# Allegro board SG2002_QFN88_38_2L_20230323_V13.brd
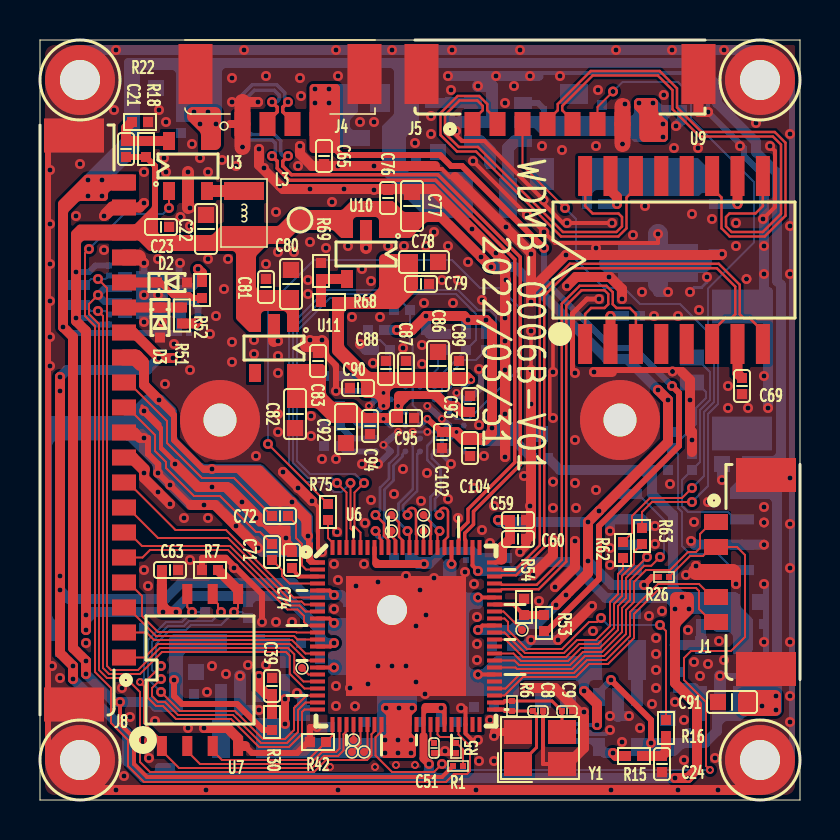
[diagram p0: board, top side]
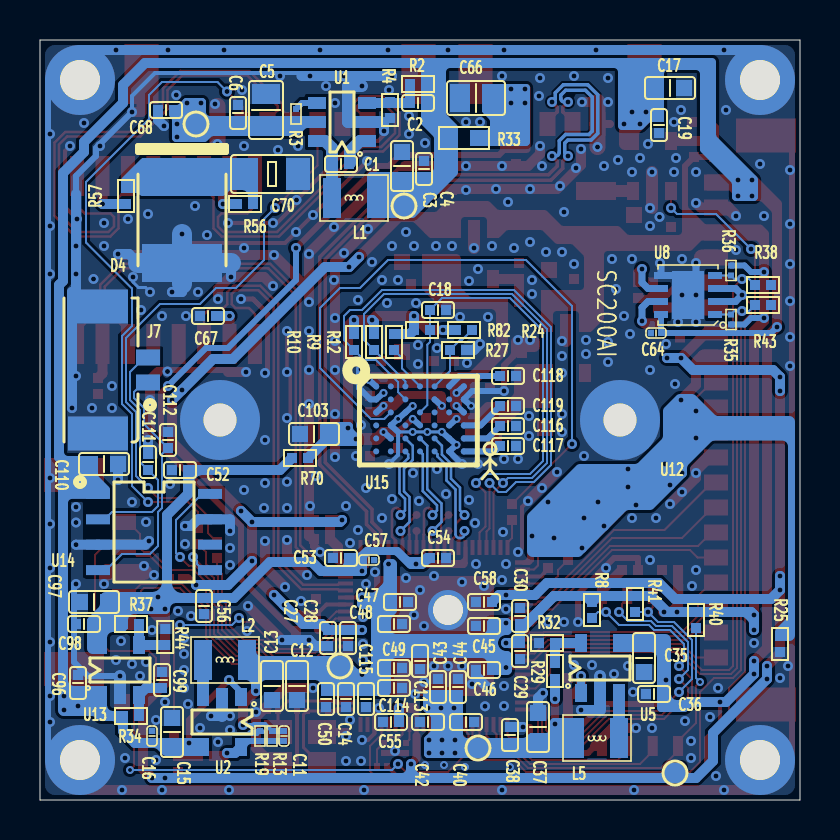
[diagram p1: board, bottom side, seen from below]

Outline 38 x 38 mm; copper layers: TOP, BOTTOM. Coordinates in mm from the lower left corner of the outline.
Outline path: 0,38 38,38 38,0 0,0 0,38

## Design rules (mm)
net group EPHY_RX: nets EPHY_RXN EPHY_RXP
net group EPHY_TX: nets EPHY_TXN EPHY_TXP
net group MIPI_RX0_0: nets MIPI_RX0_0N MIPI_RX0_0P
net group MIPI_RX0_1: nets MIPI_RX0_1N MIPI_RX0_1P
net group MIPI_RX0_MC: nets MIPI_RX0_MCN MIPI_RX0_MCP
net group RX_D: nets RX_D+ RX_D-
net group TX_D: nets TX_D+ TX_D-
net group USB_D: nets USB_DM USB_DP
net group DEFF: nets 5V_USB_OUT 12V_IN +1.2V_VDDL +2.8V_VDDH AADC_AIN_MIC1 AC_OUT ALARM_IN ALARM_OUT AUD_MIC_L AUD_OUT CAM_MCLK0 CAM_RST0 CHASSI_GND EPHY_LNK_LED EPHY_LNK_LED_1 EPHY_LNK_SPD EPHY_LNK_SPD_1 GND_SIGNAL I2C_ID_SEL IIC2_SCL IIC2_SDA INCK IOVDD IRCUT_ENA IRCUT_ENB KEY_SET LED_CTRL MAIN_+3.3V N19124200 N19124268 N19124324 N19124380 N19178192 N19178196 N19178310 N19178371 N19299732 N19299837 N19299849 N19981555 N19981677 N19981766 N20100926 N20101039 N20359461 N20362253 N20362287 N20419535 N20419548 N20419561 N20419574 N20435624 N20435628 N20551611 N20551905 N20556122 N205514611 P5V_IN PWM0_BUCK PWR_SEQ2 PWR_VBAT_DET PWRDOWN RS485DN RS485DN_1 RS485DP RS485DP_1 SD_PWR_EN SDIO_CD SDIO_CLK SDIO_CMD SDIO_D0 SDIO_D1 SDIO_D2 SDIO_D3 SPI_CLK SPI_CS_X SPI_HOLD_X SPI_MISO SPI_MOSI SPI_WP_X SPK_EN SYS_XTAL_IN SYS_XTAL_OUT UART0_RX UART0_TX UART1_RX UART1_TX UART_RE_DE VBUS_DET VCC_+1.8V VDDC VDDQ_1.35V

## Placement (name value [footprint] x y rotation side)
C1  0.1uF  [C0402]  22.95 31.8 0 bottom
C2  100pF  [C0402]  19.1 34.85 180 bottom
C3  22uF  [C0603]  19.9 31.7 90 bottom
C4  0.1uF  [C0402]  18.8 31.55 90 bottom
C5  22uF_16V  [C0805]  26.7 34.5 90 bottom
C6  0.1uF_16V  [C0402]  28.1 34.35 90 bottom
C8  12pF  [C0201]  24.9 4.45 0 top
C9  12pF  [C0201]  26.35 4.45 0 top
C11  100pF  [C0201]  25.8 3.2 90 bottom
C12  10uF  [C0603]  25.15 5.7 270 bottom
C13  10uF  [C0603]  26.4 5.7 270 bottom
C14  1uF  [C0402]  22.7 5.05 270 bottom
C15  22uF  [C0603]  31.4 3.4 90 bottom
C16  0.1uF  [C0201]  32.4 3.2 90 bottom
C17  10uF  [C0603]  6.5 35.6 180 bottom
C18  0.1uF  [C0402]  18.1 24.5 180 bottom
C19  0.1uF  [C0402]  7.05 33.75 270 bottom
C21  NC_33pF  [C0402]  4.3 32.55 270 top
C22  22uF  [C0603]  8.3 28.55 90 top
C23  0.1uF  [C0402]  6.05 28.65 0 top
C24  2.2uF  [C0402]  31.1 1.8 270 top
C27  2.2uF  [C0402]  23.6 8.1 270 bottom
C28  0.1uF  [C0402]  22.6 8.1 270 bottom
C29  0.1uF  [C0402]  14 7.45 270 bottom
C30  0.1uF  [C0402]  14 9.2 90 bottom
C35  10uF  [C0603]  7.8 7.1 270 bottom
C36  0.1uF  [C0402]  7.3 5.3 0 bottom
C37  10uF  [C0603]  13.1 3.65 90 bottom
C38  4.7uF  [C0402]  14.5 3.25 90 bottom
C39  1uF  [C0402]  11.6 5.7 90 top
C40  4.7uF  [C0402]  16.7 3.9 180 bottom
C42  0.1uF  [C0402]  18.6 3.9 0 bottom
C43  0.1uF  [C0402]  18.1 5.65 90 bottom
C44  1uF  [C0402]  17.1 5.65 90 bottom
C45  0.1uF  [C0402]  15.8 8.7 0 bottom
C46  0.1uF  [C0402]  15.8 6.5 0 bottom
C47  0.1uF  [C0402]  20 9.9 180 bottom
C48  1uF  [C0402]  20.3 8.8 180 bottom
C49  1uF  [C0402]  20.3 6.6 180 bottom
C50  1uF  [C0402]  23.7 5.05 270 bottom
C51  0.1uF  [C0201]  19.7 2.6 270 top
C52  2.2uF  [C0402]  31 16.5 0 bottom
C53  0.1uF  [C0402]  22.95 12.1 0 bottom
C54  0.1uF  [C0402]  18.1 12.1 180 bottom
C55  0.1uF  [C0402]  20.45 3.9 0 bottom
C56  0.1uF  [C0402]  29.8 9.7 270 bottom
C57  0.1uF  [C0201]  21.55 12 180 bottom
C58  0.1uF  [C0402]  15.8 9.9 0 bottom
C59  2.2uF  [C0402]  23.9 14 0 top
C60  2.2uF  [C0402]  23.9 13.05 0 top
C63  2.2uF  [C0402]  6.5 11.5 0 top
C64  0.1uF  [C0201]  7.2 23.35 180 bottom
C65  0.1uF  [C0402]  14.2 32.2 270 top
C66  22uF  [C0805]  16.2 35.1 0 bottom
C67  0.1uF  [C0402]  29.6 24.2 0 bottom
C68  0.1uF_16V  [C0402]  31.7 34.5 0 bottom
C69  0.1uF  [C0402]  35.1 20.7 270 top
C70  1000pF_2KV  [C1206]  26.4 31.3 0 bottom
C71  2.2uF  [C0402]  11.6 12.4 90 top
C72  2.2uF  [C0402]  12 14.2 0 top
C74  4.7uF  [C0402]  12.6 12 270 top
C76  0.1uF  [C0402]  17.4 30.1 90 top
C77  10uF  [C0603]  18.6 29.7 90 top
C78  10uF  [C0603]  19.2 26.9 0 top
C79  0.1uF  [C0402]  19.05 25.8 0 top
C80  10uF  [C0603]  12.55 25.8 90 top
C81  0.1uF  [C0402]  11.3 25.65 90 top
C82  10uF  [C0603]  12.75 19.3 270 top
C83  0.1uF  [C0402]  13.9 21.95 90 top
C86  10uF  [C0603]  19.9 21.7 90 top
C87  4.7u  [C0402]  18.3 21.55 90 top
C88  0.1uF  [C0402]  17.3 21.55 270 top
C89  0.1uF  [C0402]  20.95 21.55 270 top
C90  0.1uF  [C0402]  15.9 20.6 0 top
C91  10uF  [C0603]  34.6 4.9 180 top
C92  10uF  [C0603]  15.3 18.55 270 top
C93  4.7uF  [C0402]  21.5 19.8 90 top
C94  0.1uF  [C0402]  16.5 18.7 90 top
C95  0.1uF  [C0402]  18.3 19.1 180 top
C96  0.1uF  [C0402]  36.1 5.85 90 bottom
C97  22uF  [C0603]  35.3 9.9 0 bottom
C98  0.1uF  [C0402]  35.8 8.8 0 bottom
C99  1uF  [C0402]  31.9 6 90 bottom
C102  0.1uF  [C0402]  20.1 18 270 top
C103  10uF  [C0603]  24.3 18.3 0 bottom
C104  0.1uF  [C0402]  21.5 17.6 90 top
C110  10uF  [C0603]  34.8 16.8 180 bottom
C111  1uF  [C0402]  32.6 16.9 90 bottom
C112  1uF  [C0402]  31.6 18 90 bottom
C113  4.7uF  [C0402]  19 6.95 270 bottom
C114  1uF  [C0402]  20.3 5.6 180 bottom
C115  4.7uF  [C0402]  21.7 5.05 270 bottom
C116  2.2uF  [C0402]  14.6 18.7 0 bottom
C117  2.2uF  [C0402]  14.6 17.7 0 bottom
C118  NC/2.2uF  [C0402]  14.6 21.2 0 bottom
C119  NC/2.2uF  [C0402]  14.6 19.7 0 bottom
D2  PESDHC5D7VU  [SOD523_0D9X1D3]  6.6 25.88 180 top
D3  PESDHC5D7VU  [SOD523_0D9X1D3]  6 23.88 90 top
D4  SMBJ14A  [D_SMB_5D6X4D0]  30.9 29 90 bottom
EPAD_HOLE1  H1  [M_1D5_2D0]  17.6 9.5 0 top
H1  H1  [M_2D0_3D5]  36 2 0 top
H2  H1  [M_2D0_3D5]  36 36 0 top
H3  H1  [M_2D0_3D5]  2 36 0 top
H4  H1  [M_2D0_3D5]  2 2 0 top
J1  1.25_5ALT  [WF5_3D5X10D75_1D25_SMD_L]  33.4 11.4 90 top
J4  1.25-4ALT  [WF4_3D5X9D5_1D25_SMD_L]  12 33.4 180 top
J5  1.25-8ALT  [WF8_3D5X14D5_1D25_SMD_L]  26 33.4 180 top
J7  1.25-2ALT  [WF2_3D5X7D0_1D25_SMD_L]  32.2 21.5 270 bottom
J8  1.25-20ALT  [WF20_3D5X29D5_1D25_SMD]  4.6 19 270 top
L1  WPN252012H2R2MT_2.2uH_2A  [L1008]  22.3 30.1 180 bottom
L2  WPN252012H1R0MT_1uH_4A  [L1008]  28.75 7 180 bottom
L3  WPN252012H2R2MT_2.2uH_2A  [L1008]  10.2 29.35 270 top
L5  WPN252012E1R0MT_1uH_3A  [L1008]  10.15 3.1 0 bottom
R1  30K/1%  [R0201]  20.9 1.7 0 top
R2  100K_1%  [R0402]  19.1 35.8 0 bottom
R3  100K_1%  [R0201]  25.2 34.3 270 bottom
R4  13K_1%  [R0402]  20.5 34.5 270 bottom
R5  10K/1%  [R0201]  20.8 2.6 270 top
R6  1M  [R0201]  23.6 4.7 270 top
R7  NC/4.7K  [R0402]  8.5 11.5 180 top
R8  4.7K  [R0402]  10.4 9.5 270 bottom
R9  4.7K_5%  [R0402]  21.3 22.9 90 bottom
R10  4.7K_5%  [R0402]  22.3 22.9 90 bottom
R12  4.7K  [R0402]  20.3 22.9 90 bottom
R13  10K_1%  [R0201]  26.4 3.2 270 bottom
R15  40.2K  [R0402]  29.7 2.2 0 top
R16  1K  [R0402]  31.3 3.6 90 top
R18  100K_1%  [R0402]  5.3 32.55 90 top
R19  20K_1%  [R0201]  27 3.2 90 bottom
R22  22.6K_1%  [R0402]  5 33.9 0 top
R24  NC/4.7K_5%  [R0402]  16.8 23.5 0 bottom
R25  0R  [R0402]  1 7.8 270 bottom
R26  4.7K  [R0201]  31.2 11.15 180 top
R27  0R_5%  [R0402]  17.1 22.5 0 bottom
R29  15K_1%  [R0402]  12.25 6.45 90 bottom
R30  33K  [R0402]  11.6 3.9 90 top
R32  12K_1%  [R0402]  12.65 7.85 0 bottom
R33  0R  [R0603]  16.8 33.1 0 bottom
R34  33K  [R0402]  33.45 4.2 180 bottom
R35  4.7K  [R0201]  3.45 24.02 270 bottom
R36  4.7K  [R0201]  3.45 26.48 90 bottom
R37  NC  [R0402]  33.45 8.8 180 bottom
R38  100R  [R0402]  1.85 25.75 0 bottom
R40  4.7K  [R0402]  5.2 9 90 bottom
R41  4.7K  [R0402]  8.25 9.8 90 bottom
R42  4.7K  [R0402]  13.9 2.9 180 top
R43  100R  [R0402]  1.85 24.75 0 bottom
R44  NC  [R0402]  31.74 8.15 90 bottom
R51  10R  [R0402]  7.1 24.23 270 top
R52  10R  [R0402]  8.1 25.5 270 top
R53  NC_22K  [R0402]  25.2 8.85 90 top
R54  12K  [R0402]  24.2 9.65 270 top
R56  75R_1%  [R0402]  27.75 29.8 0 bottom
R57  75R_1%  [R0402]  33.7 30.2 270 bottom
R62  1K  [R0402]  29.15 12.5 90 top
R63  1K  [R0402]  30.1 13.2 270 top
R68  30K  [R0402]  14.45 24.9 0 top
R69  12K  [R0402]  14.05 26.45 90 top
R70  0R  [R0402]  25 17.1 0 bottom
R75  33R_5%  [R0402]  14.4 14.4 270 top
R82  4.7K  [R0402]  18.9 23.5 0 bottom
TP1  TP  [TP0D4]  13.1 6.6 90 top
TP2  TP  [TP0D4]  15.68 3 0 top
TP3  TP6_D1P8V  [TP1D0]  6.25 1.35 180 bottom
TP4  TP  [TP0D4]  16.2 2.4 0 top
TP5  TP  [TP0D4]  15.6 2.4 270 top
TP6  TP  [TP0D4]  24.1 8.5 270 top
TP7  test_pin  [TP1D0]  23 6.7 180 bottom
TP8  test_pin  [TP1D0]  13 29 0 top
TP9  TP  [TP0D4]  19.18 13.45 0 top
TP10  test_pin  [TP1D0]  16.1 2.6 90 bottom
TP11  test_pin  [TP1D0]  30.2 33.8 0 bottom
TP12  test_pin  [TP1D0]  19.8 29.7 180 bottom
TP13  TP  [TP0D4]  19.18 14.25 0 top
TP14  TP  [TP0D4]  17.57 13.45 0 top
TP15  TP  [TP0D4]  17.57 14.25 0 top
U1  ETA8110  [SOT236_2D9X1D6_0D95]  22.9 33.9 90 bottom
U2  ETA3448S2F  [SOT235_2D9X1D6_0D95]  28.9 3.9 0 bottom
U3  ETA3414S2F  [SOT235_2D9X1D6_0D95]  7.4 31.7 0 top
U5  ETA3414S2F  [SOT235_2D9X1D6_0D95]  10 6.6 180 bottom
U6  CV182XA_QFN88  [QFN88_9D0X9D0_0D35_E]  18.3 8.2 0 top
U7  NOR/FLASH/16MB/3.3V  [SOP8_5D28X5D28_1D27]  8 6.5 90 top
U8  TPT75176A  [DFN8_3D0X3D0_0D65_E]  5.6 25.25 0 bottom
U9  M1601AG  [TF16_12D1X5D1_1D27]  31.7 27 0 top
U10  ETA5050V0S2F  [SOT235_2D9X1D6_0D95]  16.3 27.3 180 top
U11  ETA5050V12S2F  [SOT235_2D9X1D6_0D95]  11.7 22.6 180 top
U12  Holder_A02_037_026  [LENS_IR_24D0X17_20D0]  19 19 90 bottom
U13  ETA5050V18S2F  [SOT235_2D9X1D6_0D95]  34 6.5 180 bottom
U14  BA6208F  [SOP8_4D4X5D0_1D27]  32.3 13.4 180 bottom
U15  SC200AI  [CSP41_4D438X5D896_0D65_0D73]  19 19 180 bottom
Y1  25MHz/12.5pF  [XTAL_3D2X2D5]  25 2.6 0 top

## Library data of the parts
C1 C2 C11 C21 = SC0402_3p3nF_50V
C3 C97 = SC0603_22uF_6p3V
C4 C6 C14 C16 C19 C23 C24 C28-C30 C36 C38 C40 C42-C60 C63-C65 C68 C76 C79 C81 C83 C96 C98 C102 C113-C115 = SC0402_0p1uF_16V
C5 C12 C17 C66 C77 = SC0805_22uF_16V
C8 C9 = SC0402_12pF_16V
C13 C15 C22 C27 C35 C37 C71 C72 C91 C111 C112 C116-C119 = SC0402_1uF_25V
C18 C67 C69 C74 C78 C80 C82 C86-C90 C92-C95 C103 C104 C110 = C
C39 C99 = SC0402_4p7uF_6p3V
C70 = CAP NP
D2 D3 = DIODE BI_DIR TRIG_0
D4 = DIODE SCHOTTKY_0
EPAD_HOLE1 H1-H4 = H
J1 = 1.25_5ALT
J4 = CON6_1
J5 = CON6_2
J7 = CON2_1
J8 = CON6_4
L1-L3 L5 = L
R1 R29 R68 R70 = SR0402_680K_+/-1%
R2-R4 R6-R10 R12 R13 R18 R19 R22 R24-R27 R33-R38 R40-R44 R51 R52 R56 R57 R62 R63 R75 R82 = R
R5 R32 R69 = SR0402_130K_+/-1%
R15 R16 R30 = SR0402_100K_+/-1%
R53 = SR0402_18K_+/-1%
R54 = R_10K
TP1-TP15 = TP60
U1 = G2832TB1U_0
U2 U3 U5 = G2822T11U_0
U6 = Mars_CV182X_QFN88
U7 = ESMT_SPINOR_WSON8_5
U8 = SN65HVD82_0
U9 = M1601AG
U10 = LDO-PT5108/RT9013_2
U11 U13 = G9091-180T11U
U12 = CAM_Holder
U14 = BA6208F_1
U15 = IMX327LQR-C_1
Y1 = XTAL_25MHz_7

## Footprints (pads in the part's own frame, mm; a bottom-side part is the same pattern mirrored in y, then rotated)
C0201
  rect 0.3x0.3 smd: 1(-0.25,0) 2(0.25,0)
C0402
  rect 0.5x0.5 smd: 1(-0.4,0) 2(0.4,0)
C0603
  rect 0.8x0.8 smd: 1(-0.7,0) 2(0.7,0)
C0805
  rect 1x1.4 smd: 1(-0.8,0) 2(0.8,0)
C1206
  rect 1.2x1.6 smd: 1(-1.3,0) 2(1.3,0)
CSP41_4D438X5D896_0D65_0D73
  round 0.3 smd: A1(-2.19,1.679) A2(-1.46,1.679) A3(-0.73,1.679) A4(0,1.679) A5(0.73,1.679) A6(1.46,1.679) A7(2.19,1.679) B1(-2.19,1.029) B2(-1.46,1.029) B3(-0.73,1.029) B5(0.73,1.029) B6(1.46,1.029) B7(2.19,1.029) C1(-2.19,0.379) C2(-1.46,0.379) C3(-0.73,0.379) C4(0,0.379) C5(0.73,0.379) C6(1.46,0.379) C7(2.19,0.379) D1(-2.19,-0.271) D2(-1.46,-0.271) D3(-0.73,-0.271) D4(0,-0.271) D5(0.73,-0.271) D6(1.46,-0.271) D7(2.19,-0.271) E1(-2.19,-0.921) E2(-1.46,-0.921) E3(-0.73,-0.921) E4(0,-0.921) E5(0.73,-0.921) E6(1.46,-0.921) E7(2.19,-0.921) F1(-2.19,-1.571) F2(-1.46,-1.571) F3(-0.73,-1.571) F4(0,-1.571) F5(0.73,-1.571) F6(1.46,-1.571) F7(2.19,-1.571)
D_SMB_5D6X4D0
  rect 1.9x4 smd: N(2.15,0) P(-2.15,0)
DFN8_3D0X3D0_0D65_E
  rect 0.7x0.35 smd: 1(-1.35,0.975) 2(-1.35,0.325) 3(-1.35,-0.325) 4(-1.35,-0.975) 5(1.35,-0.975) 6(1.35,-0.325) 7(1.35,0.325) 8(1.35,0.975)
  rect 1.6x2.4 smd: 9(0,0)
L1008
  rect 0.9x2 smd: 1(-1.1,0) 2(1.1,0)
LENS_IR_24D0X17_20D0
  round 4 hole 1.65: 1(0,10) 2(0,-10)
M_1D5_2D0
  round 2 hole 1.5: 1(0,0)
M_2D0_3D5
  round 3.5 hole 2: 1(0,0)
QFN88_9D0X9D0_0D35_E
  rect 0.75x0.2 smd: 1(-4.425,3.675) 2(-4.425,3.325) 3(-4.425,2.975) 4(-4.425,2.625) 5(-4.425,2.275) 6(-4.425,1.925) 7(-4.425,1.575) 8(-4.425,1.225) 9(-4.425,0.875) 10(-4.425,0.525) 11(-4.425,0.175) 12(-4.425,-0.175) 13(-4.425,-0.525) 14(-4.425,-0.875) 15(-4.425,-1.225) 16(-4.425,-1.575) 17(-4.425,-1.925) 18(-4.425,-2.275) 19(-4.425,-2.625) 20(-4.425,-2.975) 21(-4.425,-3.325) 22(-4.425,-3.675) 45(4.425,-3.675) 46(4.425,-3.325) 47(4.425,-2.975) 48(4.425,-2.625) 49(4.425,-2.275) 50(4.425,-1.925) 51(4.425,-1.575) 52(4.425,-1.225) 53(4.425,-0.875) 54(4.425,-0.525) 55(4.425,-0.175) 56(4.425,0.175) 57(4.425,0.525) 58(4.425,0.875) 59(4.425,1.225) 60(4.425,1.575) 61(4.425,1.925) 62(4.425,2.275) 63(4.425,2.625) 64(4.425,2.975) 65(4.425,3.325) 66(4.425,3.675)
  rect 0.2x0.75 smd: 23(-3.675,-4.425) 24(-3.325,-4.425) 25(-2.975,-4.425) 26(-2.625,-4.425) 27(-2.275,-4.425) 28(-1.925,-4.425) 29(-1.575,-4.425) 30(-1.225,-4.425) 31(-0.875,-4.425) 32(-0.525,-4.425) 33(-0.175,-4.425) 34(0.175,-4.425) 35(0.525,-4.425) 36(0.875,-4.425) 37(1.225,-4.425) 38(1.575,-4.425) 39(1.925,-4.425) 40(2.275,-4.425) 41(2.625,-4.425) 42(2.975,-4.425) 43(3.325,-4.425) 44(3.675,-4.425) 67(3.675,4.425) 68(3.325,4.425) 69(2.975,4.425) 70(2.625,4.425) 71(2.275,4.425) 72(1.925,4.425) 73(1.575,4.425) 74(1.225,4.425) 75(0.875,4.425) 76(0.525,4.425) 77(0.175,4.425) 78(-0.175,4.425) 79(-0.525,4.425) 80(-0.875,4.425) 81(-1.225,4.425) 82(-1.575,4.425) 83(-1.925,4.425) 84(-2.275,4.425) 85(-2.625,4.425) 86(-2.975,4.425) 87(-3.325,4.425) 88(-3.675,4.425)
  rect 6x6 smd: 89(0,0)
R0201
  rect 0.3x0.3 smd: 1(-0.25,0) 2(0.25,0)
R0402
  rect 0.5x0.5 smd: 1(-0.4,0) 2(0.4,0)
R0603
  rect 0.8x0.8 smd: 1(-0.7,0) 2(0.7,0)
SOD523_0D9X1D3
  rect 0.5x0.5 smd: N(0.75,0) P(-0.75,0)
SOP8_4D4X5D0_1D27
  rect 1.2x0.5 smd: 1(-2.8,1.905) 2(-2.8,0.635) 3(-2.8,-0.635) 4(-2.8,-1.905) 5(2.8,-1.905) 6(2.8,-0.635) 7(2.8,0.635) 8(2.8,1.905)
SOP8_5D28X5D28_1D27
  rect 1x0.5 smd: 1(-3.8,1.905) 2(-3.8,0.635) 3(-3.8,-0.635) 4(-3.8,-1.905) 5(3.8,-1.905) 6(3.8,-0.635) 7(3.8,0.635) 8(3.8,1.905)
SOT235_2D9X1D6_0D95
  rect 0.6x0.9 smd: 1(-0.95,-1.25) 2(0,-1.25) 3(0.95,-1.25) 4(0.95,1.25) 5(-0.95,1.25)
SOT236_2D9X1D6_0D95
  rect 0.6x0.9 smd: 1(-0.95,-1.25) 2(0,-1.25) 3(0.95,-1.25) 4(0.95,1.25) 5(0,1.25) 6(-0.95,1.25)
TF16_12D1X5D1_1D27
  rect 0.7x2 smd: 1(-4.445,-4.2) 2(-3.175,-4.2) 3(-1.905,-4.2) 4(-0.635,-4.2) 5(0.635,-4.2) 6(1.905,-4.2) 7(3.175,-4.2) 8(4.445,-4.2) 9(4.445,4.2) 10(3.175,4.2) 11(1.905,4.2) 12(0.635,4.2) 13(-0.635,4.2) 14(-1.905,4.2) 15(-3.175,4.2) 16(-4.445,4.2)
TP0D4
  round 0.4 smd: 1(0,0)
TP1D0
  round 1 smd: 1(0,0)
WF2_3D5X7D0_1D25_SMD_L
  rect 0.8x1.2 smd: 1(0.625,-0.4) 2(-0.625,-0.4)
  rect 1.7x3 smd: 3(-3.175,-2.9) 4(3.175,-2.9)
WF4_3D5X9D5_1D25_SMD_L
  rect 0.8x1.2 smd: 1(1.875,-0.4) 2(0.625,-0.4) 3(-0.625,-0.4) 4(-1.875,-0.4)
  rect 1.7x3 smd: 5(-4.225,-2.9) 6(4.225,-2.9)
WF5_3D5X10D75_1D25_SMD_L
  rect 0.8x1.2 smd: 1(2.5,-0.4) 2(1.25,-0.4) 3(0,-0.4) 4(-1.25,-0.4) 5(-2.5,-0.4)
  rect 1.7x3 smd: 6(-4.85,-2.9) 7(4.85,-2.9)
WF8_3D5X14D5_1D25_SMD_L
  rect 0.8x1.2 smd: 1(4.375,-0.4) 2(3.125,-0.4) 3(1.875,-0.4) 4(0.625,-0.4) 5(-0.625,-0.4) 6(-1.875,-0.4) 7(-3.125,-0.4) 8(-4.375,-0.4)
  rect 1.7x3 smd: 9(-6.925,-2.9) 10(6.925,-2.9)
WF20_3D5X29D5_1D25_SMD
  rect 0.8x1.2 smd: 1(11.875,-0.4) 2(10.625,-0.4) 3(9.375,-0.4) 4(8.125,-0.4) 5(6.875,-0.4) 6(5.625,-0.4) 7(4.375,-0.4) 8(3.125,-0.4) 9(1.875,-0.4) 10(0.625,-0.4) 11(-0.625,-0.4) 12(-1.875,-0.4) 13(-3.125,-0.4) 14(-4.375,-0.4) 15(-5.625,-0.4) 16(-6.875,-0.4) 17(-8.125,-0.4) 18(-9.375,-0.4) 19(-10.625,-0.4) 20(-11.875,-0.4)
  rect 1.7x3 smd: 21(-14.225,-2.9) 22(14.225,-2.9)
XTAL_3D2X2D5
  rect 1.4x1.2 smd: 1(-1.1,-0.8) 2(1.1,-0.8) 3(1.1,0.8) 4(-1.1,0.8)

## Nets
5V_USB_OUT: C65.1 C66.1 J4.4 R33.1 R53.1
12V_IN: C5.1 C6.1 C68.1 J5.8 R3.2 TP11.1(TP) U1.5(VIN)
+1.2V_VDDL: C82.1 C83.1 C92.1 C93.1 C94.2 C95.2 U11.5(VOUT) U15.B5(DVDD1) U15.C1(DVDD2) U15.D6(DVDD3)
+2.8V_VDDH: C78.1 C79.1 C86.1 C87.1 C88.2 C89.2 C90.2 R68.2 U10.5(OUT) U15.A1(AVDD2) U15.A7(AVDD1) U15.C7(AVDD3)
GND: C3.2 C4.2 C5.2 C6.2 C8.2 C9.2 C12.2 C13.2 C14.2 C15.2 C16.2 C17.2 C18.2 C19.2 C22.2 C23.2 C24.2 C27.2 C28.2 C29.2 C30.2 C35.2 C36.2 C37.2 C38.2 C39.2 C40.2 C42.2 C43.2 C44.2 C45.2 C46.2 C47.2 C48.2 C49.2 C50.2 C51.2 C52.2 C53.2 C54.2 C55.2 C56.2 C57.2 C58.2 C59.2 C60.2 C63.2 C64.1 C65.2 C66.2 C67.2 C68.2 C69.2 C70.1 C76.2 C77.2 C78.2 C79.2 C80.2 C81.2 C82.2 C83.2 C86.2 C87.2 C88.1 C89.1 C90.1 C91.2 C92.2 C93.2 C94.1 C95.1 C96.2 C97.2 C98.2 C99.2 C102.2 C103.2 C104.1 C110.2 C111.2 C112.2 C113.2 C114.2 C115.2 C116.1 C117.1 C118.1 C119.1 D2.P(ANODE) D3.P(ANODE) D4.P EPAD_HOLE1.1(H) H1.1(H) H2.1(H) H3.1(H) H4.1(H) J1.3 J1.6 J1.7 J4.1 J4.5 J4.6 J5.7 J5.9 J5.10 J7.3 J7.4 J8.9 J8.17 J8.19 J8.21 J8.22 R4.2 R5.2 R7.2 R19.2 R22.2 R25.2 R27.1 R32.2 R42.2 R44.2 R54.1 R69.2 U1.2(GND) U2.2(GND) U3.2(GND) U5.2(GND) U6.42((PWR_PTEST)___[PD]|[FS]________) U6.89(E-PAD) U7.4(VSS) U8.5(GND) U8.9(EPAD) U10.2(GND) U11.2(GND) U12.1 U12.2 U13.2(GND) U14.3(GND1) U14.7(GND2) U15.B1(AGND1) U15.B7(AGND2) U15.C3(DGND1) U15.D2(DGND3) U15.E6(DGND4) U15.F6(DGND2) Y1.2(G1) Y1.4(G2)
GND_SIGNAL: C74.1 J8.10 J8.13 R25.1 U6.1(VSS18A_AUD)
P5V_IN: C2.2 C3.1 C4.1 C15.1 C16.1 C17.1 C19.1 C35.1 C36.1 C64.2 C91.1 C96.1 C110.1 J8.20 L1.2 R1.1 R2.1 R30.1 R33.2 R34.1 TP12.1(TP) U2.1(EN) U2.4(VIN) U3.4(VIN) U5.4(VIN) U8.8(VCC) U13.1(VIN) U14.1(VCC)
VBUS_DET: R53.2 R54.2 U6.60((USB_VBUS_DET/XGPIOB[6]/CAM_MCL)
VCC_+1.8V: C52.1 C53.1 C54.1 C55.1 C56.1 C57.1 C58.1 C97.1 C98.1 J8.14 R37.1 R70.2 TP3.1(TP) U6.5(VDD18A_AUD) U6.36(VDDIO_RTC) U6.39((PWR_RSTN)___[PU]|[FS]_________) U6.68(VDD18A_USB_PLL_ETH) U6.82(VDD18A_MIPI) U13.5(VOUT)
VDDC: C11.2 C12.1 C13.1 C14.1 C45.1 C46.1 C47.1 C48.1 C49.1 C50.1 C113.1 C114.1 C115.1 L2.2 R13.1 TP7.1(TP) U6.9(VDDC_1) U6.16(VDDC_2) U6.50(VDDC_3) U6.61(VDDC_4) U6.71(VDDC_5)
VDDQ_1.35V: C37.1 C38.1 C40.1 C42.1 C43.1 C44.1 L5.2 R29.1 TP10.1(TP) U6.31(VDDQ_DRAM_1) U6.32(VDDQ_2) U6.33(VDDQ_1) U6.34(VDDQ_DRAM_2)
AADC_AIN_MIC1: C72.1 J8.12
AC_OUT: C71.2 J8.11
ALARM_IN: J1.5 U6.47((PWR_GPIO[0]/UART2_TX/PWR_UART0)
ALARM_OUT: J1.4 U6.48((PWR_GPIO[1](PWRSAR1.VIN2)/UART)
AUD_MIC_L: C72.2 U6.2(((PAD_AUD_AINL_MIC)/XGPIOC[23]/)
AUD_OUT: C71.1 U6.4(((PAD_AUD_AOUTR)/XGPIOC[24]/IIS)
CAM_MCLK0: R75.2 U6.88(((PAD_MIPI_TXP0)/VI0_D[10]/VO_D)
CAM_RST0: C18.1 R82.1 U6.84((CV_4WTDI_CR_SCL0/VI0_D[14]/VO_) U15.C4(XSHUTDN)
CHASSI_GND: C70.2 D4.N R56.1 R57.1
EPHY_LNK_LED: R63.2 U6.55((PWR_SD1_CMD_VO36/SPI2_SDO/IIC3)
EPHY_LNK_LED_1: J5.6 R63.1
EPHY_LNK_SPD: R62.1 U6.56((PWR_SD1_CLK_VO37/SPI2_SCK/IIC3)
EPHY_LNK_SPD_1: J5.3 R62.2
EPHY_RXN: U6.62(((PAD_ETH_RXM)/UART3_CTS/CAM_MC) U9.1(TD+)
EPHY_RXP: U6.63(((PAD_ETH_RXP)/UART3_TX/CAM_MCL) U9.3(TD-)
EPHY_TXN: U6.64(((PAD_ETH_TXM)/UART3_RTS/IIC1_S) U9.6(RD+)
EPHY_TXP: U6.65(((PAD_ETH_TXP)/UART3_RX/IIC1_SC) U9.8(RD-)
I2C_ID_SEL: R24.1 R27.2 U15.A5(SID)
IIC2_SCL: R9.1 U6.86((CV_4WTCK_CR_2WTCK/VI0_D[12]/VO) U15.A3(SCL)
IIC2_SDA: R10.1 U6.85((CV_4WTDO_CR_2WTMS/VI0_D[11]/VO) U15.B3(SDA)
INCK: R75.1 U15.C2(EXTCLK)
IOVDD: C102.1 C103.1 C104.2 R9.2 R10.2 R12.2 R24.2 R70.1 R82.2 U15.D4(DOVDD2) U15.E2(DOVDD1)
IRCUT_ENA: U6.52((PWR_SD1_D2_VO33/IIC1_SCL/UART2) U14.8(AIN)
IRCUT_ENB: U6.53((PWR_SD1_D1_VO34/IIC1_SDA/UART2) U14.5(BIN)
KEY_SET: J1.2 R26.1 U6.30((AUX0/XGPIOA[30]/IIS1_MCLK/VO_D)
LED_CTRL: J1.1 U6.51((PWR_SD1_D3_VO32/SPI2_CS_X/IIC1)
MAIN_+3.3V: C21.2 C22.1 C23.1 C27.1 C28.1 C29.1 C30.1 C59.1 C60.1 C63.1 C76.1 C77.1 C80.1 C81.1 J8.18 L3.2 R8.1 R18.1 R26.2 R35.2 R36.2 R40.2 R41.2 TP8.1(TP) U6.13(VDDIO_SD0_EMMC) U6.57(VDDIO_SD1) U6.66(VDD33A_ETH_USB) U7.8(VCC) U10.1(IN) U10.3(EN) U11.1(VIN) U11.3(EN)
MIPI_RX0_0N: U6.81(((PAD_MIPIRX0P)/VI0_D[8]/VO_D[5) U15.F5(D8/MDN0)
MIPI_RX0_0P: U6.80(((PAD_MIPIRX0N)/VI0_D[7]/VO_D[6) U15.E5(D9/MDP0)
MIPI_RX0_1N: U6.73((CV_4WTMS_CR_SDA0/VI0_D[0]/VI1_) U15.E3(D5/MDN1)
MIPI_RX0_1P: U6.72((CV_4WTDI_CR_SCL0/VI0_CLK/VI1_D) U15.F3(D6/MDP1)
MIPI_RX0_3N: TP9.1(TP) U6.75((CV_4WTCK_CR_2WTCK/VI0_D[2]/VI1)
MIPI_RX0_3P: TP13.1(TP) U6.74((CV_4WTDO_CR_2WTMS/VI0_D[1]/VI1)
MIPI_RX0_4N: TP14.1(TP) U6.79(((PAD_MIPIRX1P)/VI0_D[6]/VO_D[7)
MIPI_RX0_4P: TP15.1(TP) U6.78(((PAD_MIPIRX1N)/VI0_D[5]/VO_D[8)
MIPI_RX0_MCN: U6.77(((PAD_MIPIRX2P)/VI0_D[4]/VO_D[9) U15.E4(D7/MCN)
MIPI_RX0_MCP: U6.76(((PAD_MIPIRX2N)/VI0_D[3]/VO_D[1) U15.F4(PCLK/MCP)
PWM0_BUCK: R16.2 U6.58((PWM[0]/XGPIOB[0])___[PD]|[FS]_)
PWR_SEQ2: U3.1(EN) U6.41((PWR_SEQ2/PWR_GPIO[4])___[PD]|_)
PWR_VBAT_DET: R1.2 R5.1 U6.38((PWR_VBAT_DET(PWRSAR.VIN3))___[)
PWRDOWN: R12.1 U15.A4(PWDNB)
RS485DN: R52.1(A) U8.6(A)
RS485DN_1: D2.N(CATHODE) J8.16 R52.2(B)
RS485DP: R51.2(B) U8.7(B)
RS485DP_1: D3.N(CATHODE) J8.15 R51.1(A)
RX_D+: J5.2 U9.14(TX-)
RX_D-: J5.1 U9.16(TX+)
SD_PWR_EN: J8.1 U6.15((SDIO0_PWR_EN/XGPIOA[14])___[PD)
SDIO_CD: J8.2 U6.14((SDIO0_CD/XGPIOA[13])___[PU]|__)
SDIO_CLK: J8.8 U6.6((SDIO0_CLK/IIC1_SDA/SPI0_SCK/XG)
SDIO_CMD: J8.7 U6.7((SDIO0_CMD/IIC1_SCL/SPI0_SDO/XG)
SDIO_D0: J8.6 U6.8((SDIO0_D[0]/CAM_MCLK1/SPI0_SDI/)
SDIO_D1: J8.5 U6.10((SDIO0_D[1]/IIC1_SDA/AUX0/XGPIO)
SDIO_D2: J8.4 U6.11((SDIO0_D[2]/IIC1_SCL/AUX1/XGPIO)
SDIO_D3: J8.3 U6.12((SDIO0_D[3]/CAM_MCLK0/SPI0_CS_X)
SPI_CLK: U6.21((EMMC_CLK/SPINOR_SCK/SPINAND_CL) U7.6(SCK)
SPI_CS_X: R40.1 U6.25((EMMC_DAT[1]/SPINOR_CS_X/SPINAN) U7.1(CSZ)
SPI_HOLD_X: R41.1 U6.20((EMMC_DAT[2]/SPINOR_HOLD_X/SPIN) U7.7(HOLD#(IO3))
SPI_MISO: U6.24(SPINOR_MISO/SPINAND_MISO/XGPIOA) U7.2(SO(IO1))
SPI_MOSI: R7.1 R8.2 U6.22((EMMC_DAT[0]/SPINOR_MOSI/SPINAN) U7.5(SI(IO0))
SPI_WP_X: R42.1 U6.23((EMMC_DAT[3]/SPINOR_WP_X/SPINAN) U7.3(WP#(IO2))
SPK_EN: TP1.1(TP) U6.17(((CAM_RST0--GPIO)/XGPIOA[15])__)
SYS_XTAL_IN: C8.1 R6.2 U6.45(XTAL_XIN) Y1.1(X1)
SYS_XTAL_OUT: C9.1 R6.1 U6.46(XTAL_XOUT) Y1.3(X2)
TX_D+: J5.5 U9.9(RX-)
TX_D-: J5.4 U9.11(RX+)
UART0_RX: R35.1 R43.2 U6.19((UART0_RX/CAM_MCLK0/PWM[5]/XGPI) U8.1(R)
UART0_TX: R36.1 R38.2 U6.18((UART0_TX/CAM_MCLK1/PWM[4]/XGPI) U8.4(D)
UART1_RX: TP5.1(TP) U6.27((CV_2WTCK_CR_4WTCK/CAM_MCLK1/PW)
UART1_TX: TP2.1(TP) U6.26((CV_2WTMS_CR_4WTMS/CAM_MCLK0/PW)
UART_RE_DE: U6.29((CV_SDA0__CR_4WTDO/UART1_RX/UAR) U8.2(RE#) U8.3(DE)
USB_DM: J4.3 U6.70(USB_DM)
USB_DP: J4.2 U6.69(USB_DP)
N19124200: C67.1 U9.2(TCT)
N19124268: R56.2 U9.15(TCM)
N19124324: C69.1 U9.7(RCT)
N19124380: R57.2 U9.10(TCM-)
N19178192: C1.1 U1.1(BS)
N19178196: C1.2 L1.1 U1.6(SW)
N19178310: C2.1 R2.2 R4.1 U1.3(FB)
N19178371: R3.1 U1.4(EN)
N19299732: L5.1 U5.3(LX)
N19299837: R29.2 R32.1 U5.5(FB)
N19299849: C39.1 R30.2 U5.1(EN)
N19981555: L2.1 U2.3(LX)
N19981677: C11.1 R13.2 R15.1 R19.1 U2.5(FB)
N19981766: C24.1 R15.2 R16.1
N20100926: L3.1 U3.3(LX)
N20101039: C21.1 R18.2 R22.1 U3.5(FB)
N20359461: R68.1 R69.1 U10.4(SNS/NC)
N20362253: C112.1 J7.1 U14.4(AOUT)
N20362287: C111.1 J7.2 U14.2(BOUT)
N20419535: C116.2 U15.E7(VREFH)
N20419548: C117.2 U15.F7(VREFN)
N20419561: C118.2 U15.A6(NC2)
N20419574: C119.2 U15.D7(NC3)
N20435624: C99.1 R34.2 U13.3(EN)
N20435628: R37.2 R44.1 U13.4(NC)
N20551611: C74.2 U6.3(AUD_AVREF)
N20551905: TP6.1(TP) U6.59(((ADC1)/XGPIOB[3]/KEY_COL2)___[)
N20556122: TP4.1(TP) U6.28((CV_SCL0__CR_4WTDI/UART1_TX/UAR)
N205514611: C51.1 U6.37(VDDC_RTC)

Pads without a net: R38 1; R43 1; U6 35 40 43 44 49 54 67 83 87; U9 4 5 12 13; U11 4; U14 6; U15 A2 B2 B6 C5 C6 D1 D3 D5 E1 F1 F2

## Via types
v1: diameter 0.5, hole 0.25, TOP to BOTTOM, 513 vias
v2: diameter 0.4, hole 0.2, TOP to BOTTOM, 22 vias

## Routing (per net, layer and track width the routed paths; a pad name or vN(x,y) marks a point on that pad's centre or on a via; arc(x,y) is an arc through that point)
5V_USB_OUT: length 38.5
  TOP w0.3: v1(25.2,27.6) 21.1,31.7 20.55,31.7 20,32.25 15.05,32.25 14.7,32.6 C65.1 ; v1(31.6,20.7) 31.95,20.35 31.95,17.7 27.95,13.7 27.95,11.05 25.35,8.45 R53.1
  BOTTOM w0.3: v1(31.6,20.7) 29.7,22.6 28.6,22.6 25.2,26 v1(25.2,27.6)
  vias: v1(13.75,35.55) v1(13.75,34.85) v1(14.45,35.55) v1(14.45,34.85)
12V_IN: length 5.5
  BOTTOM w0.5: v1(29.95,34.85) 29.95,33.45 26.3,33.45 C5.1
  vias: v1(30.65,34.85) v1(31.15,33.8) v1(31.15,33.15)
+1.2V_VDDL: length 6.2
  TOP w0.4: C93.1 21.13,19.4 v2(20.82,19.7) 20.4,19.7 19.85,20.25 18.2,20.25 17.91,19.95 v2(17.91,19.7)
  TOP w0.6: C92.1 14.9,19.25
  BOTTOM w0.3: U15.C1 v2(20.82,19.7) ; v2(17.18,19.05) U15.D6 ; U15.B5 v2(17.91,19.7)
+2.8V_VDDH: length 2.1
  TOP w0.4: v2(21.55,21) 21.41,21.15 C89.2
  BOTTOM w0.3: v2(21.55,21) U15.A1 ; v2(17.18,20.35) U15.A7 ; v2(17.18,19.7) U15.C7
GND: length 411.7
  TOP w0.175: v1(24.55,23.45) v1(24.55,21.5) ; v1(25.65,19.1) 25.49,19.25 25.49,21.24 v1(25.65,21.4) v1(25.65,23.45)
  TOP w0.2: v1(28.6,28.85) v1(26.35,28.85) 26.15,28.85 25.18,29.82 v1(25.18,30) 22.23,32.95 21.1,32.95 20.7,33.35 v1(20.8,33.45) ; 20.75,31.15 20.5,31.15 20.1,31.55 19.9,31.55 19.75,31.7 ; C8.2 25.15,1.8 Y1.2 ; v1(36.5,32.7) 36.75,32.45 36.75,29.65 v1(36.15,29.05) ; v1(30.9,28.3) 30.9,27.85 25.75,27.85 v1(25.2,28.4) v1(24.35,29.25) v1(21.65,31.95) ; v1(21.05,4.6) 21.27,4.6 21.27,3.33 21.6,3 v1(21.9,3) ; v1(13.6,14.95) 13.9,14.65 13.9,12.6 v1(14.1,12.4)
  TOP w0.25: v1(27.95,25.05) 27.35,25.05 26.62,24.32 26.62,21.35 v1(26.75,21.35)
  TOP w0.3: v1(11.1,8.9) 11.1,10.3 9.3,12.1 8.1,12.1 R7.2 ; v1(13.85,3.65) 13.5,3.65 13.5,3 12.85,2.35 10.6,2.35 10.25,2.7 ; J8.21 0.4,33.23 0.4,2 H4.1 ; 14.3,22.8 14.3,22.23 14.8,21.73 v1(14.8,20.45) ; R5.2 20.35,2.35 v1(20.25,2.45) 20.15,2.35 C51.2 ; 32.1,21.4 32.1,21.5 28.6,21.5 28.6,21.4
  TOP w0.4: v1(24,12.4) 24.3,12.7 C60.2 ; Y1.4 22.7,3.4 v1(22.7,3.2) ; 9.5,33.8 J4.1
  TOP w0.45: 5.2,16.52 v1(5.2,16.35)
  TOP w0.5: v1(5.2,29.85) 4.97,29.62 J8.19 ; H1.1 36,0.5 v1(33.9,0.5) v1(31.9,0.5) v1(28.55,0.5) v1(21.8,0.5) v1(14.9,0.5) v1(8.3,0.5) v1(3.8,0.5) 2.2,0.5 2.2,2 H4.1 ; v1(24.35,5.6) 25.75,5.6 27.2,4.15 27.2,2.6 26.5,1.9 26.2,1.9 Y1.2 ; 28.6,21.4 v1(27.7,21.4) ; 11.7,22.95 v1(11.9,22.95) ; v1(27.6,9.7) v1(25.9,8) ; 34.65,11.4 34.8,11.4 v1(34.8,10.8) ; v1(25.75,10.65) 26.75,11.65 v1(26.75,12.95) ; v1(24.65,11.25) 25.65,12.25 v1(25.65,13) ; v1(5.2,16.35) 5.2,16.1 v1(5.9,15.4) v1(6.5,14.8) ; C60.2 24.55,13.2 v1(24.55,19.8) v1(24.55,21.5) ; v1(29.25,34.8) 29.12,34.7 ; v1(29.1,25.05) 29.1,25.55 28.5,26.15 v1(28.45,26.15) 26.8,26.15 v1(26.35,25.7) ; v1(24.55,24.9) 24.55,25.5 ; 24.55,25.5 v1(24.55,27.3) 24.55,27.35 20.75,31.15 ; 24.55,25.5 v1(26.3,27.25) 34.05,27.25 v1(34.1,27.3) ; v1(5.2,26.85) 4.92,27.12 4.9,27.12 ; v1(10.95,32.55) 10.95,31.75 v1(12,30.7) 12.15,30.55 v1(13.5,30.55) v1(15.2,30.55) 19.6,30.55 v1(21.6,28.55) v1(22.8,27.35) 23.25,26.9 v1(23.25,24.1) v1(23.25,22.95) v1(23.25,21.5) v1(23.25,19.3) v1(23.25,17.15) ; v1(33.4,34.4) 32.92,34.4 J5.9 ; 32.6,17.4 v1(32.6,18) 32.6,18.4 32.5,18.4 v1(32.5,20) 32.5,21 32.1,21.4 ; v1(13,32.7) 13,32.3 13.6,31.7 v1(14.9,31.7) v1(16.7,31.7) 19.75,31.7 ; v1(8.2,3.6) 9.38,3.6 9.9,3.07 U7.4 10.25,2.7 ; v1(12.15,16.4) v1(13.6,14.95) ; 7.4,29.6 v1(7.5,29.6) ; 10.12,34.9 v1(10.9,34.9) ; 32.8,11.4 v1(32.8,11.7) ; 3.3,29.3 v1(3.2,29.2)
  TOP w0.6: 5.2,16.52 4.6,17.12 J8.9 ; v1(7.4,31.4) U3.2 7.4,29.6 ; 3.3,29.3 3.62,29.62 J8.19 ; v1(16.3,27.6) U10.2 ; U11.2 11.7,22.95
  TOP w0.8: 29.12,34.7 J5.7 v1(29.12,32.8) ; 32.8,11.4 J1.3 34.65,11.4 ; 10.12,34.9 J4.1 v1(10.12,32.65) ; J8.17 4.9,27.12
  BOTTOM w0.15: v2(17.91,18.4) v2(18.64,18.4) v2(19.36,18.4) 20.09,18.4 ; v1(33.35,26.15) 33.35,25.9 33.08,25.62 32.73,25.62 v1(32.5,25.4)
  BOTTOM w0.2: R19.2 27.15,3.3 28.3,3.3 v1(28.5,3.5) ; 20.09,18.4 20.09,17.25 v1(20.55,16.8) ; v1(33.4,34.4) 33.4,35.2 32.25,36.35 24.93,36.35 24.93,36.2
  BOTTOM w0.3: v2(17.91,18.4) U15.E6 v2(17.18,17.75) U15.F6 16.91,16.8 v1(16.9,16.8) ; v2(19.36,19.7) U15.C3 v2(20.09,19.05) U15.D2 20.09,18.4 ; v2(16.45,19.7) U15.B7 16.39,20.45 v1(14.8,20.45) ; H2.1 37.6,36 37.6,2 H1.1 ; v2(20.82,20.35) U15.B1 21.48,20.03 22.05,20.6 22.05,21.45 v1(21.95,21.55) ; v1(36.2,10.8) 36.3,10.8 36.3,6.9 35.6,6.2 v1(34,6.2) ; 36.2,30.3 36.2,31.2 35.2,32.2 35.2,32.6 v1(33.4,34.4)
  BOTTOM w0.35: v1(5.2,26.85) 5.2,26.23 U8.5 6.95,26.85 v1(7,26.85)
  BOTTOM w0.5: 30.9,25.8 30.9,25.4 v1(31.4,25.4) ; 36.2,30.3 v1(36.2,27.7) v1(36.2,26.3) 36.2,25.4 36.4,25.4 v1(36.4,19.6) ; v1(20.8,33.45) 20.8,33.9 21,33.9 ; C68.2 32.1,34 v1(31.8,33.7) ; R27.1 16.3,22.5 v1(16,22.8) ; v1(12.85,5.35) 13.1,5.1 C37.2 ; v1(30.75,13.7) 30.43,13.7 30.1,14.04 U14.7 28.5,14.04 v1(28.5,13.45) ; C46.2 16.2,6.2 15.6,5.6 v1(15.5,5.6) ; H2.1 36,37.5 v1(34.2,37.5) v1(31.6,37.5) v1(28.8,37.5) v1(24,37.5) v1(20.6,37.5) v1(17.6,37.5) v1(14.8,37.5) v1(10.2,37.5) v1(3.8,37.5) 2,37.5 H3.1 ; C27.2 24.25,7.7 v1(24.55,8) v1(25.9,8) ; v1(34.1,16) C110.2 ; v1(20.4,36.2) v1(22.8,36.2) v1(24.5,36.2) 24.93,36.2 ; 28.45,26.85 v1(28.45,26.15) ; v1(32.55,12.95) 32.73,12.77 U14.3 v1(36.2,12.77) ; v1(34.1,27.3) 33.55,27.3 33.1,26.85 ; v1(13.85,3.65) C38.2 ; 28.9,4.2 v1(29.45,4.2) ; 10,4.5 v1(10.95,4.5) ; v1(32.6,18) C111.2
  BOTTOM w0.6: 21,33.9 U1.2 22.6,33.9 22.6,35.7 v1(21.9,35.7) ; U13.2 v1(34,6.2) ; U2.2 28.9,4.2 ; 10,4.5 U5.2 v1(10,6.2)
  BOTTOM w1: D4.P 30.9,25.8 ; D4.P v1(30.9,28.3) ; D4.P 33.1,26.85 ; D4.P 28.45,26.85
  vias: v1(0.5,31.5) v1(0.5,28.8) v1(0.5,26.8) v1(0.5,24.95) v1(0.5,23.15) v1(0.5,21.7) v1(0.6,6.7) v1(1,6.1) v1(1.8,29.2) v1(2,31.8) v1(2.3,7.85) v1(3.2,27.5) v1(3.7,34.5) v1(4.1,5.6) v1(4.2,1.2) v1(4.5,4.15) v1(5.2,31.4) v1(5.2,25.25) v1(5.2,23.9) v1(5.2,11.5) v1(5.4,10.7) v1(5.45,2.95) v1(5.45,2.1) v1(5.75,3.95) v1(5.9,27.05) v1(5.9,25.25) v1(5.95,34.5) v1(6.1,23.9) v1(6.2,32.1) v1(6.25,20.8) v1(6.3,33.9) v1(6.3,31.4) v1(6.7,22.8) v1(7.03,29.15) v1(7.2,14.1) v1(7.4,3.6) v1(7.5,28.7) v1(7.5,21.5) v1(7.5,12) v1(7.6,32.8) v1(8,32.1) v1(8.35,5.4) v1(8.4,31.4) v1(8.4,27.05) v1(8.4,14.1) v1(8.5,23.3) v1(8.6,6.7) v1(8.8,24.2) v1(9.1,32) v1(9.2,25.55) v1(9.3,6.3) v1(9.4,27.05) v1(9.6,36.1) v1(9.6,34.9) v1(9.6,22.9) v1(9.6,21.9) v1(9.7,11.6) v1(9.8,31.7) v1(10.4,6.75) v1(10.7,23) v1(10.7,22.3) v1(10.8,17.2) v1(11.2,31.6) v1(11.3,36.2) v1(11.3,26.8) v1(11.3,6.75) v1(11.8,29.4) v1(11.8,8.9) v1(11.9,27.4) v1(11.9,22.2) v1(11.9,21.35) v1(11.9,19.3) v1(11.9,18.4) v1(12.6,8.9) v1(12.7,27.4) v1(12.9,31.7) v1(12.9,15.6) v1(13,36.1) v1(13.05,35.2) v1(13.4,26) v1(13.4,25.3) v1(13.5,27.9) v1(13.5,23) v1(13.55,19.2) v1(13.55,18.2) v1(14.1,23) v1(14.1,17.05) v1(14.3,27.6) v1(14.6,29.9) v1(14.7,11.8) v1(14.7,9.55) v1(14.8,17.05) v1(14.85,13.4) v1(14.8,5.7) v1(14.8,4.7) v1(14.9,36.2) v1(14.9,11) v1(15.4,27.7) v1(15.6,24.15) v1(15.8,10.7) v1(15.75,4.69) v1(16,33.9) v1(16.1,26.55) v1(16.1,16.8) v1(16.25,13.85) v1(16.2,11.8) v1(16.4,5.8) v1(16.55,25.95) v1(16.65,21.85) v1(16.55,15) v1(16.7,33.9) v1(16.7,30.5) v1(16.9,10.9) v1(16.9,6.7) v1(17,24.15) v1(17.4,27.7) v1(17.6,6.7) v1(17.7,15.3) v1(18.15,22.6) v1(18.15,16.55) v1(18.2,27.7) v1(18.3,11.2) v1(18.3,6.7) v1(18.75,32.85) v1(18.8,8.7) v1(18.8,5.9) v1(19,10.5) v1(19.1,22.75) v1(19.1,21.8) v1(19.05,14.95) v1(19.2,24.85) v1(19.25,5.3) v1(19.3,27.7) v1(19.3,9.25) v1(19.35,16.35) v1(19.55,34.2) v1(19.55,33.3) v1(19.7,28.4) v1(19.7,11.1) v1(20.1,26) v1(20.4,27.7) v1(20.4,15.05) v1(20.55,35.5) v1(20.65,24.85) v1(20.9,26) v1(20.9,14.1) v1(21.25,11.4) v1(21.4,26.9) v1(21.7,15.6) v1(21.7,10.8) v1(21.95,18.75) v1(21.85,9.15) v1(21.85,7.8) v1(21.85,7) v1(21.95,1.95) v1(22.1,25) v1(22.1,13.5) v1(22.2,17.2) v1(22.5,12.85) v1(22.5,4) v1(22.7,14.7) v1(22.7,1.95) v1(23.25,34.85) v1(23.3,28.65) v1(23.3,26) v1(23.7,35.7) v1(24.2,16.2) v1(24.5,14.7) v1(24.95,9.95) v1(25.1,32.7) v1(25.65,14.6) v1(25.65,15.91) v1(26,36.2) v1(26.1,32.5) v1(26.75,18) v1(26.75,15.85) v1(26.8,14.6) v1(27.2,4.4) v1(27.65,8.45) v1(27.8,32.7) v1(27.8,27.6) v1(27.8,15.5) v1(27.9,35.5) v1(28.5,12.6) v1(28.5,11.75) v1(28.5,4.2) v1(29.1,2.9) v1(29.65,28.25) v1(30,3.6) v1(30.1,25.4) v1(30.25,29.7) v1(30.45,9.2) v1(30.6,4.8) v1(30.7,24.2) v1(30.75,12.8) v1(30.8,8.1) v1(30.8,7.3) v1(30.8,6.5) v1(30.8,5.6) v1(31.1,9.45) v1(31.19,35.25) v1(31.5,15.8) v1(31.62,21.43) v1(31.7,32.6) v1(31.75,4.9) v1(31.9,24.2) v1(32.2,4) v1(32.2,2) v1(32.3,11.25) v1(32.4,8.5) v1(32.6,29.3) v1(32.7,13.9) v1(32.7,6.9) v1(32.9,32.6) v1(32.95,24.5) v1(33,6.2) v1(33.4,14.9) v1(33.4,6.8) v1(33.6,29.05) v1(33.75,2.1) v1(33.95,7.95) v1(34.2,7) v1(34.4,20.7) v1(34.4,19.6) v1(34.8,28.85) v1(34.8,27.7) v1(35,32.7) v1(35.33,26.05) v1(35.4,19.6) v1(35.8,33.85) v1(36.2,21.2) v1(36.2,14.65) v1(36.2,13.88) v1(36.2,7.9) v1(37.5,33.3) v1(37.5,28.7) v1(37.5,26.3) v1(37.5,16.1) v1(37.5,13.8) v1(37.5,11.6) v1(37.5,7.9) v1(37.5,5.2) v1(37.5,3.9) v2(14.5,1.65) v2(16.75,1.65) v2(17.8,1.75) v2(18.75,1.75)
GND_SIGNAL: length 33.8
  TOP w0.2: v1(12.6,14.9) 13.4,14.1 v1(13.4,13.2) 13.4,12 13.53,11.88 U6.1 ; v1(6.75,16.8) 6.75,16.88 6.05,17.57 6.05,18.6 v1(5.2,19.45)
  TOP w0.3: v1(12.6,14.9) 11,16.5 8.2,16.5 6.7,18 6.7,19.25 v1(5.95,20) ; 7.55,14.75 7.5,14.75 v1(6.5,15.75) v1(5.9,16.35) 5.9,16.8 5.4,17.3 5.4,18.1 v1(5.2,18.1) 5,18.1
  TOP w0.5: J8.10 4.72,18.38 5,18.1 ; v1(10.1,14.9) 9.35,15.65 v1(8.6,15.65) 7.9,15.65 v1(6.75,16.8) ; 7.55,14.75 v1(8.2,14.75) 8.75,14.75 v1(9.8,13.7) v1(10.9,12.6) ; 5.05,21.85 5.2,21.85 5.2,20.75 v1(5.95,20)
  TOP w0.8: J8.13 4.78,22.12 5.05,21.85
  vias: v1(8.6,16.55) v1(10.8,14.1) v1(12.3,13.1)
P5V_IN: length 139.4
  TOP w0.2: v1(4,4.9) 4,3.8 4.7,3.1 4.7,1.8 5.35,1.15 20.1,1.15 R1.1
  TOP w0.3: v1(30.55,2.85) 30.55,4 v1(28.55,6) ; v1(6.7,6) 6.7,5.2 7.1,4.8 9.85,4.8 11.15,3.5 R30.1
  TOP w0.5: v1(2.3,6.3) v1(2.3,6.95) 1.65,7.6 1.65,23.15 v1(1.15,23.65) 1.15,29.52 2.4,30.77 v1(2.4,30.2)
  BOTTOM w0.3: U8.8 C64.2 1.45,23.35 v1(1.15,23.65) ; v1(28.55,6) 27.95,5.4 U2.1
  BOTTOM w0.5: v1(7.7,34.4) 7.7,36.85 32.75,36.85 33.85,35.75 33.85,34.85 35.8,32.9 35.8,32.4 36.85,31.35 36.85,25.95 37.05,25.75 37.05,17.15 36.85,16.95 36.85,5.05 35.75,5.05 34.9,4.2 R34.1 33.85,3.45 33.25,2.85 31.4,2.85 C15.1 ; v1(6.7,6) 6.7,4.65 5.8,4.65 5.55,4.9 v1(4,4.9) 3.7,4.9 v1(2.3,6.3) v1(2.3,6.95)
  vias: v1(2.4,31) v1(3.1,31) v1(3.1,30.2) v1(8,33.8) v1(8.4,34.4) v1(8.8,33.8) v1(36.1,4.7) v1(36.8,5.2) v1(36.8,4.5)
VBUS_DET: length 2.7
  TOP w0.2: R54.2 23.68,9.78 22.73,9.78
  TOP w0.4: R53.2 R54.2
VCC_+1.8V: length 125.7
  TOP w0.2: U6.82 16.73,11.85 16.82,11.85 ; v1(14.7,10.25) 14.47,10.47 U6.5 ; U6.68 21.62,11.72 v1(21.9,11.45) ; 20.23,3.77 20.23,4.6 v1(20.05,4.6) 19.18,4.6 19.18,3.2
  TOP w0.4: v1(19.45,1.8) 19.18,2.08 19.18,3.2 ; 16.82,11.85 16.88,11.8 v1(19.2,11.8)
  TOP w0.5: v1(6.65,22.1) v1(5.95,22.1) 4.67,23.38 J8.14 ; v1(31.75,9.55) 31.75,5.85 32.85,4.75 32.85,1.55 v1(32.4,1.1) v1(31.75,1.1) ; v1(1,21.15) v1(1,20.45) v1(1,11.2) v1(1,10.5) 1,7.35 v1(1.65,6.7) v1(1.65,6.05)
  BOTTOM w0.1: TP3.1 7.1,1.1
  BOTTOM w0.3: 21.85,12 C57.1 21.8,11.55 v1(21.9,11.45) ; 18.7,11.95 C54.1
  BOTTOM w0.4: 18.7,11.95 18.85,11.8 v1(19.2,11.8) 19.5,11.8 20.15,12.45 21.65,12.45 21.85,12.25 21.85,12
  BOTTOM w0.5: 19.45,1.1 v1(31.75,1.1) v1(32.4,1.1) ; 19.45,1.1 v1(19.45,1.8) ; 19.45,1.1 5.2,1.1 4.35,1.95 4.35,3.35 v1(1.65,6.05) v1(1.65,6.7) ; v1(1,11.2) v1(1,10.5) 1.45,10.05 6.25,10.05 7.05,10.85 12.65,10.85 13.25,10.25 v1(14.7,10.25) 15.05,10.25 C58.1 ; 31.65,10.15 31.4,10.1 C56.1 28.3,10.1 26.5,11.9 24.4,11.9 23.95,11.45 v1(21.9,11.45) ; 31.65,10.15 v1(32.1,10.15) ; 31.65,10.15 31.65,14.25 30.6,15.3 C52.1 26,16.5 R70.2 ; v1(6.65,22.1) v1(5.95,22.1) 5.35,21.5 1.35,21.5 v1(1,21.15) v1(1,20.45) ; v1(20.05,4.6) C55.1
  vias: v1(32.45,9.55)
VDDC: length 21.5
  TOP w0.2: v1(20.57,11.8) U6.71 ; U6.16 v1(14.7,6.62) ; v1(14.7,8.85) 14.47,9.07 U6.9 ; 22.73,6.28 v1(21.9,6.28) ; U6.61 v1(21.9,10.12)
  TOP w0.5: v1(27.85,3.75) 27.85,4.8 v1(27.2,5.45)
  BOTTOM w0.2: v1(27.85,3.75) 27.35,3.75 27.3,3.8 26.75,3.8 R13.1
  BOTTOM w0.3: R13.1 C11.2
  BOTTOM w0.5: C12.1 24.9,6.5 ; 15.85,7.6 15.4,7.15 C46.1
  BOTTOM w1: 15.85,7.6 20.95,7.6 20.95,5.8 23,5.8 23,6.5 24.9,6.5
VDDQ_1.35V: length 5.8
  TOP w0.2: 18.48,3.77 18.48,4.47 v1(18.6,4.6) ; 18.12,3.77 18.12,4.42 v1(17.95,4.6) 17.77,4.42 17.77,3.77 ; v1(17.3,4.6) 17.43,4.47 17.43,3.77
  TOP w0.4: v1(12.25,3.8) v1(12.25,5.05)
  BOTTOM w0.5: v1(12.25,5.05) R29.1
  vias: v1(17.25,3) v1(17.25,2.35) v1(17.9,3) v1(17.9,2.35) v1(18.55,3) v1(18.55,2.35)
AADC_AIN_MIC1: length 10.8
  TOP w0.1: J8.12 4.42,20.88 6.35,18.95 6.35,17.85 8.1,16.1 9.7,16.1 C72.1
AC_OUT: length 10.9
  TOP w0.1: C71.2 11,13.4 10.8,13.4 9,15.2 7.7,15.2 6.3,16.6 6.3,16.9 5.75,17.45 5.75,18.25 4.38,19.62 J8.11
ALARM_IN: length 15.2
  TOP w0.1: J1.5 33.6,8.9 32.95,9.55 32.95,10.45 32.8,10.6 31,10.6 29.7,9.3 29.7,8.1 28.4,6.8 27.45,6.8 26.8,6.15 24.15,6.15 23.23,5.22 U6.47
ALARM_OUT: length 14.2
  TOP w0.1: 22.73,5.58 23.27,5.58 24.05,6.35 26.7,6.35 27.35,7 28.3,7 29.5,8.2 29.5,9.4 30.9,10.8 32.95,10.8 33.6,10.15 J1.4
AUD_MIC_L: length 3.6
  TOP w0.1: C72.2 12.8,13.8 12.8,13.1 13.1,12.8 13.1,11.72 13.3,11.53 U6.2
AUD_OUT: length 2.9
  TOP w0.1: U6.4 12.47,10.82 12.1,11.2 12.1,11.5 C71.1
CAM_MCLK0: length 1.5
  TOP w0.1: R75.2 14.4,13.1 14.62,12.88 U6.88
CAM_RST0: length 25.8
  TOP w0.1: 16.02,12.62 16.02,13.38 15.72,13.68 15.72,15.38 v1(16.2,15.85)
  BOTTOM w0.1: U15.C4 18.64,19.74 18.64,22.77 18.5,22.9 R82.1 C18.1 17.9,25.1 14.5,25.1 12.85,23.45 12.85,16.95 13.5,16.3 15.75,16.3 v1(16.2,15.85)
CHASSI_GND: length 1.8
  BOTTOM w0.5: R56.1 27.35,30.6 27.9,31.15 C70.2
EPHY_LNK_LED: length 11.7
  TOP w0.1: R63.2 29.7,12.4 29.7,11.8 29.1,11.2 29.1,10.2 28.7,9.8 28.7,8.6 27.9,7.8 26.95,7.8 26.3,7.15 24.15,7.15 23.27,8.03 U6.55
EPHY_LNK_LED_1: length 33.2
  TOP w0.1: J5.6 27.88,34.65 v1(28.65,35.42) ; v1(32.6,14.9) 30.6,14.9 30.1,14.4 R63.1
  BOTTOM w0.1: v1(32.6,14.9) 33.4,15.7 33.4,19.3 33.9,19.8 33.9,23.2 33.4,23.7 33.4,25.57 35.7,27.88 35.7,30.9 32.55,34.05 32.55,35.25 31.9,35.9 29.12,35.9 v1(28.65,35.42)
EPHY_LNK_SPD: length 10.4
  TOP w0.1: U6.56 23.23,8.38 24.25,7.35 26.2,7.35 26.85,8 27.8,8 28.5,8.7 28.5,9.9 28.9,10.3 28.9,11.3 29.15,11.55 R62.1
EPHY_LNK_SPD_1: length 29.4
  TOP w0.1: J5.3 24.12,31.73 v1(26.25,29.6) ; R62.2 29.6,13.35 29.6,14.2 30.5,15.1 32.1,15.1 v1(32.6,15.6)
  BOTTOM w0.1: v1(32.6,15.6) 33.2,16.2 33.2,19.4 33.7,19.9 33.7,23.1 32,24.8 30,24.8 29.2,25.6 28.2,25.6 26.8,27 26.8,29.05 v1(26.25,29.6)
EPHY_RXN: length 22.9
  TOP w0.125: U6.62 23.04,10.47 23.1,10.54 24.93,10.54 26.31,11.92 26.31,24.72 27.08,25.49 28.22,25.49 28.41,25.3 28.41,24.79 28.23,24.6 27.55,24.6 27.25,24.3 U9.1
EPHY_RXP: length 23.2
  TOP w0.125: U6.63 23.04,10.82 23.1,10.76 24.84,10.76 26.09,12.01 26.09,24.81 26.99,25.71 28.32,25.71 28.64,25.39 28.64,24.79 28.82,24.6 29.5,24.6 29.8,24.3 29.8,22.8
EPHY_TXN: length 29.7
  TOP w0.125: 22.73,11.18 23.04,11.18 23.1,11.24 23.81,11.24 25.21,12.64 25.21,25.21 26.59,26.59 33.85,26.59 34.76,25.67 34.76,24.29 34.58,24.1 34.27,24.1 33.6,23.43 U9.6
EPHY_TXP: length 30.1
  TOP w0.125: U6.65 23.04,11.53 23.1,11.46 23.71,11.46 24.99,12.74 24.99,25.31 26.49,26.81 33.94,26.81 34.99,25.76 34.99,24.29 35.17,24.1 35.48,24.1 36.15,23.43 U9.8
I2C_ID_SEL: length 3.7
  BOTTOM w0.1: R24.1 16.9,23 17,23 R27.2 17.5,21.45 U15.A5
IIC2_SCL: length 27.5
  TOP w0.1: v1(14.85,15.85) 15.32,15.38 15.32,12.62
  BOTTOM w0.1: v1(14.85,15.85) 14.6,16.1 13.4,16.1 12.65,16.85 12.65,23.55 14.4,25.3 20.8,25.3 21.8,24.3 21.8,23 R9.1 19.73,20.93 U15.A3
IIC2_SDA: length 31.5
  TOP w0.1: U6.85 15.68,13.43 15.53,13.57 v1(15.53,15.85)
  BOTTOM w0.1: U15.B3 20.09,20.39 20.09,20.89 21.2,22 21.8,22 R10.1 22.8,23 22.8,24.2 22.5,24.5 21.9,24.5 20.9,25.5 14.3,25.5 12.45,23.65 12.45,16.75 13.3,15.9 14.2,15.9 14.7,15.4 15.07,15.4 v1(15.53,15.85)
INCK: length 33.4
  TOP w0.1: R75.1 v1(11.4,17.8)
  BOTTOM w0.1: v1(11.4,17.8) 11.4,24.7 13.7,27 20.6,27 22,25.6 23,25.6 24,24.6 24,21.6 21.45,19.05 20.79,19.05 U15.C2
IOVDD: length 20.8
  TOP w0.3: v2(19.36,19.05) C102.1
  TOP w0.5: C102.1 v2(20.82,18.4) 21.23,18 C104.2 22.23,18 22.6,18.37 v1(22.6,18.6) 22.6,23.7 v1(22.3,24) v1(21.4,24) 21.2,24.2 v1(19.3,24.2) 18.6,23.5 v1(17.85,23.5)
  BOTTOM w0.3: U15.D4 v2(19.36,19.05) ; v2(20.82,18.4) U15.E2
  BOTTOM w0.5: R9.2 21.3,23.9 v1(21.4,24) ; R24.2 v1(17.85,23.5) ; R70.1 23.6,18.1 C103.1 ; v1(19.3,24.2) R82.2 19.5,23.3 R12.2 ; v1(22.3,24) R10.2
  vias: v1(22.2,18.05)
IRCUT_ENA: length 16.1
  TOP w0.1: v1(31,12.15) 30.56,11.71 30.21,11.71 29.5,11 29.5,10 29.1,9.6 29.1,8.4 28.1,7.4 27.15,7.4 26.5,6.75 23.95,6.75 23.73,6.97 U6.52
  BOTTOM w0.1: v1(31,12.15) 31.2,12.35 31.2,14 29.89,15.3 U14.8
IRCUT_ENB: length 12.4
  TOP w0.1: U6.53 23.68,7.33 24.05,6.95 26.4,6.95 27.05,7.6 28,7.6 28.9,8.5 28.9,9.7 29.3,10.1 29.3,11.1 v1(30.35,12.15)
  BOTTOM w0.1: U14.5 29.84,11.49 30.15,11.8 30.15,11.95 v1(30.35,12.15)
KEY_SET: length 37.3
  TOP w0.1: v2(33.5,1.5) 33.3,1.7 33.3,4.9 32.2,6 32.2,7.1 32.55,7.45 34.55,7.45 35.25,8.15 35.25,12.25 34.85,12.65 J1.2 33.6,12.65 33.15,12.2 32.5,12.2 R26.1 ; v1(20.1,1.8) 19.7,1.4 17.6,1.4 16.77,2.23 16.77,3.14 17.07,3.44 17.07,3.77
  BOTTOM w0.1: v2(33.5,1.5) 20.4,1.5 v1(20.1,1.8)
LED_CTRL: length 15.8
  TOP w0.1: U6.51 23.77,6.62 23.85,6.55 26.6,6.55 27.25,7.2 28.2,7.2 29.3,8.3 29.3,9.5 29.7,9.9 29.7,10.9 30.3,11.5 31.5,11.5 32.4,12.4 32.8,12.4 33,12.6 33,13.3 33.6,13.9 J1.1
MAIN_+3.3V: length 102.4
  TOP w0.1: C63.1 6.09,11.5
  TOP w0.2: U6.66 22.8,11.88 22.95,12.03 23.1,12.03 ; v1(21.9,8.5) 22.12,8.72 U6.57 ; 13.88,7.67 14.53,7.67 v1(14.7,7.85)
  TOP w0.3: C23.1 5.75,28.7 5.75,31.7 R18.1 C21.2 ; R26.2 30.6,11.15 v1(30.2,10.75)
  TOP w0.5: J8.18 2.02,28.38 1.8,28.15 v1(1.8,26.4) v1(1.8,24.1) 1.8,23.95 2.3,23.45 v1(2.3,9.25) v1(2.3,8.5) ; v1(22.9,14) C59.1 C60.1 23.1,12.65 23.1,12.03 ; TP8.1 12.45,28.45 10.2,28.45 L3.2 ; v1(25.8,9.75) v1(26.3,10.25) 27.4,11.35 v1(27.4,11.95) v1(27.4,13.9) v1(27.95,14.45) 31.4,17.9 v1(31.4,20) v1(30.9,20.5) ; U10.1 17.25,29.15 20.05,29.15 v1(22.05,27.15) v1(22.55,26.65) ; 6.09,11.5 U7.8
  BOTTOM w0.3: R36.2 2.77,26.73 2.45,26.4 v1(1.8,26.4) ; v1(1.8,24.1) 2.45,24.1 2.77,23.77 R35.2
  BOTTOM w0.5: v1(14.7,7.85) C29.1 14,8.5 12.3,10.2 10.7,10.2 R8.1 10.1,10.2 R41.2 7.45,10.2 6.65,9.4 v1(6.15,9.4) R40.2 2.45,9.4 v1(2.3,9.25) v1(2.3,8.5) ; v1(26.3,10.25) v1(25.8,9.75) 24.85,8.8 23.9,8.8 C27.1 C28.1 v1(21.9,8.5) ; v1(22.05,27.15) v1(22.55,26.65) 23.75,26.65 28.35,22.05 29.35,22.05 v1(30.9,20.5) v1(31.4,20) ; v1(30.2,10.75) 28.6,10.75 v1(27.4,11.95) ; v1(27.95,14.45) v1(27.4,13.9) 23,13.9 v1(22.9,14)
  vias: v1(6.8,9.4)
MIPI_RX0_0N: length 6.4
  TOP w0.125: U6.81 17.07,12.99 16.98,13.09 16.98,13.25 v1(16.77,13.45)
  BOTTOM w0.125: v1(16.77,13.45) 16.77,13.29 arc(16.83,13.15) 16.96,13.1 17.04,13.1 arc(17.17,13.15) 17.23,13.29 17.23,15.52 17.68,15.97 17.68,16.72 18.13,17.18 18.13,17.29 U15.F5
MIPI_RX0_0P: length 6.3
  TOP w0.125: v1(16.77,14.25) 17.2,13.82 17.2,13.21 17.43,12.99 U6.80
  BOTTOM w0.125: v1(16.77,14.25) 17,14.47 17,15.62 17.45,16.07 17.45,16.82 17.91,17.27 17.91,17.71 U15.E5
MIPI_RX0_1N: length 6.1
  TOP w0.125: v1(19.98,13.45) 19.88,13.35 U6.73
  BOTTOM w0.125: U15.E3 19.36,17.71 19.36,17 19.8,16.56 19.8,15.43 19.52,15.15 19.52,13.9 v1(19.98,13.45)
MIPI_RX0_1P: length 6.3
  TOP w0.125: U6.72 20.23,12.99 20.4,13.16 20.4,14.41 arc(20.35,14.55) 20.21,14.6 20.16,14.6 arc(20.03,14.55) 19.98,14.41 v1(19.98,14.25)
  BOTTOM w0.125: v1(19.98,14.25) 19.75,14.47 19.75,15.06 20.02,15.33 20.02,16.66 19.59,17.09 19.59,17.29 U15.F3
MIPI_RX0_3N: length 0.8
  TOP w0.125: TP9.1 U6.75
MIPI_RX0_3P: length 1.8
  TOP w0.125: TP13.1 19.55,13.87 19.55,13.29 19.52,13.26 19.52,12.62
MIPI_RX0_4N: length 0.9
  TOP w0.125: U6.79 17.77,12.99 17.57,13.19 TP14.1
MIPI_RX0_4P: length 1.9
  TOP w0.125: U6.78 18.12,12.99 17.95,13.16 17.95,13.87 TP15.1
MIPI_RX0_MCN: length 6.1
  TOP w0.125: v1(18.38,13.45) 18.48,13.35 U6.77
  BOTTOM w0.125: v1(18.38,13.45) 17.93,13.9 17.93,14.83 18.64,15.54 18.64,17.71 U15.E4
MIPI_RX0_MCP: length 6.2
  TOP w0.125: v1(18.38,14.25) 18.38,14.41 arc(18.43,14.55) 18.56,14.6 18.61,14.6 arc(18.75,14.55) 18.8,14.41 18.8,13.29 18.82,13.26 U6.76
  BOTTOM w0.125: U15.F4 18.86,17.29 18.86,15.44 18.15,14.73 18.15,14.47 v1(18.38,14.25)
PWM0_BUCK: length 14.8
  TOP w0.1: R16.2 31.3,8.45 v1(31,8.75) ; v1(28.05,9.1) 27.85,8.9 27.45,8.9 26.1,7.55 24.35,7.55 23.4,8.5 23.4,8.9 23.23,9.07 U6.58
  BOTTOM w0.1: v1(31,8.75) 28.4,8.75 v1(28.05,9.1)
PWR_SEQ2: length 52.7
  TOP w0.1: v1(2.45,27.55) 2.25,27.35 2.25,24.2 2.75,23.7 2.75,6.4 3.55,5.6 3.55,3.85 4.4,3 4.4,1.7 5.2,0.9 20.3,0.9 20.7,1.3 21.35,1.3 21.5,1.45 21.5,2.7 20.93,3.27 20.93,3.77 ; U3.1 v1(6.45,29.6)
  BOTTOM w0.1: v1(6.45,29.6) 6.15,29.3 4.2,29.3 v1(2.45,27.55)
PWR_VBAT_DET: length 2.9
  TOP w0.1: 19.88,3.77 19.88,3.27 20,3.15 20.5,3.15 R5.1 20.82,2.85 21.15,2.52 R1.2
PWRDOWN: length 2.4
  BOTTOM w0.1: U15.A4 19.9,21.58 19.9,22.1 R12.1
RS485DN: length 2.5
  TOP w0.5: R52.1 8.1,26.35 v1(7.9,26.55)
  BOTTOM w0.35: v1(7.9,26.55) 7.9,25.88 7.6,25.57 U8.6
RS485DN_1: length 4.2
  TOP w0.3: R52.2 7.6,25.1 7.45,25.25 6.65,25.25 6.03,25.88 D2.N ; 4.45,25.88 J8.16
  TOP w0.5: D2.N 4.45,25.88
RS485DP: length 2.6
  TOP w0.5: v1(7.9,23.95) 7.78,23.82 7.1,23.82
  BOTTOM w0.35: v1(7.9,23.95) 7.9,24.62 7.6,24.93 U8.7
RS485DP_1: length 2.9
  TOP w0.5: R51.1 D3.N J8.15
RX_D+: length 19.5
  TOP w0.125: J5.2 22.88,33.98 22.36,34.49 22.36,34.8 21.96,35.2 20.88,35.2 20.02,34.34 20.02,33.25 20.85,32.42 21.8,32.42 26.05,28.18 28.91,28.18 29.32,28.59 29.32,30.12 29.8,30.59 29.8,31.2
RX_D-: length 19.4
  TOP w0.125: U9.16 27.25,29.7 27.63,29.32 28.93,29.32 29.1,29.15 29.1,28.68 28.82,28.4 26.15,28.4 21.9,32.65 20.94,32.65 20.25,33.34 20.25,34.25 20.97,34.98 21.87,34.98 22.14,34.7 22.14,34.49 21.62,33.98 J5.1
SD_PWR_EN: length 10.3
  TOP w0.1: J8.1 5.22,7.12 5.9,7.8 12.5,7.8 13.32,6.97 U6.15
SDIO_CD: length 10.1
  TOP w0.1: J8.2 5.33,8.38 5.7,8 12.6,8 13.28,7.33 U6.14
SDIO_CLK: length 12.1
  TOP w0.1: U6.6 12.68,10.12 9.3,13.5 6.78,13.5 4.4,15.88 J8.8
SDIO_CMD: length 11.7
  TOP w0.1: 13.88,9.78 13.22,9.78 13.07,9.93 12.57,9.93 9.4,13.1 5.9,13.1 4.38,14.62 J8.7
SDIO_D0: length 11.3
  TOP w0.1: J8.6 4.42,13.38 5.1,12.7 9.5,12.7 12.47,9.72 12.97,9.72 13.28,9.43 U6.8
SDIO_D1: length 11.6
  TOP w0.1: U6.10 13.38,8.72 13.2,8.9 13.2,9.2 12.88,9.53 12.38,9.53 9.4,12.5 5.5,12.5 5.12,12.12 J8.5
SDIO_D2: length 11.3
  TOP w0.1: J8.4 4.42,10.88 5.1,10.2 5.1,9.2 5.9,8.4 12.8,8.4 12.82,8.38 U6.11
SDIO_D3: length 10.3
  TOP w0.1: U6.12 12.88,8.03 12.7,8.2 5.8,8.2 4.38,9.62 J8.3
SPI_CLK: length 18.9
  TOP w0.1: U7.6 8.63,10.06 8.9,9.8 8.9,9.55 v1(9.05,9.4) ; v1(6.05,6.05) 5.6,5.6 5.6,5.2 5.9,4.9 6.25,4.9 6.9,4.25 9.65,4.25 11.05,2.85 12.35,2.85 12.9,3.4 12.9,4.5 13.28,4.88 13.88,4.88
  BOTTOM w0.1: v1(6.05,6.05) 5.6,6.5 5.6,7.9 6.4,8.7 7.2,8.7 7.45,8.95 8.6,8.95 v1(9.05,9.4)
SPI_CS_X: length 17.8
  TOP w0.1: 15.32,3.77 15.32,3.44 15.18,3.29 15.18,2.48 14.9,2.2 14.2,2.2 13.6,1.6 6.95,1.6 6.09,2.46 U7.1 6.09,2.95 5.2,3.85 5.2,5.7 v2(5,5.9)
  BOTTOM w0.1: v2(5,5.9) 5.2,6.1 R40.1
SPI_HOLD_X: length 17.6
  TOP w0.1: v1(7.6,9.4) 7.37,9.63 U7.7 ; v1(6.05,5.4) 7,4.45 9.75,4.45 11.15,3.05 12.25,3.05 12.7,3.5 12.7,4.6 13.32,5.22 U6.20
  BOTTOM w0.1: v1(6.05,5.4) 5.4,6.05 5.4,8 6.3,8.9 7.1,8.9 v1(7.6,9.4) R41.1
SPI_MISO: length 9.7
  TOP w0.1: 14.97,3.77 14.97,2.58 14.8,2.4 14.1,2.4 13.5,1.8 8,1.8 7.37,2.44 U7.2
SPI_MOSI: length 22
  TOP w0.1: U7.5 9.9,9.61 v1(9.7,9.4) ; U6.22 13.22,4.53 13.1,4.4 13.1,3.3 12.45,2.65 10.95,2.65 9.55,4.05 6.8,4.05 6.15,4.7 5.8,4.7 5.4,5.1 5.4,6.05 v1(6.05,6.7)
  TOP w0.5: U7.5 9.9,10.49 R7.1
  BOTTOM w0.1: v1(6.05,6.7) 5.8,6.95 5.8,7.8 6.5,8.5 7.3,8.5 7.55,8.75 9.05,8.75 v1(9.7,9.4) 10.1,9.4 R8.2
SPI_WP_X: length 7.5
  TOP w0.1: U7.3 8.63,2.46 9.1,2 13.4,2 R42.1 14.62,3.23 14.62,3.77
SPK_EN: length 0.9
  TOP w0.1: 13.88,6.28 13.43,6.28 TP1.1
SYS_XTAL_IN: length 5.1
  TOP w0.15: Y1.1 24,1.8 24.82,2.62 24.82,4.28 C8.1 R6.2
  TOP w0.2: U6.45 23.18,4.53 23.25,4.45 R6.2
SYS_XTAL_OUT: length 4.7
  TOP w0.15: Y1.3 C9.1 25.6,4.95 R6.1
  TOP w0.2: R6.1 23.25,4.95 23.18,4.88 22.73,4.88
TX_D+: length 25.4
  TOP w0.125: J5.5 26.62,33.98 26.11,34.49 26.11,34.7 27.63,36.23 30.89,36.23 31.62,35.49 31.62,34.54 32.99,33.17 36.65,33.17 37.05,32.77 37.05,29.31 36.14,28.4 34.58,28.4 34.3,28.68 34.3,29.15 34.48,29.32 35.77,29.32 36.15,29.7 U9.9
TX_D-: length 25.6
  TOP w0.125: J5.4 25.38,33.98 25.89,34.49 25.89,34.8 27.54,36.45 30.98,36.45 31.85,35.58 31.85,34.63 33.08,33.4 36.74,33.4 37.27,32.86 37.27,29.22 36.23,28.18 34.49,28.18 34.08,28.59 34.08,30.12 33.6,30.59 U9.11
UART0_RX: length 32.7
  TOP w0.1: 13.88,5.58 13.22,5.58 12.49,6.31 12.49,7.21 12.3,7.4 6.1,7.4 5,6.3 3.45,6.3 3.15,6.6 3.15,24.2 v1(2.9,24.45)
  BOTTOM w0.1: R43.2 2.55,24.45 v1(2.9,24.45) 3.27,24.45 R35.1 U8.1
UART0_TX: length 34
  TOP w0.1: U6.18 13.18,5.92 12.71,6.39 12.71,7.29 12.4,7.6 6,7.6 4.9,6.5 3.55,6.5 3.35,6.7 3.35,25.6 v1(2.9,26.05)
  BOTTOM w0.1: U8.4 R36.1 3.27,26.05 v1(2.9,26.05) 2.55,26.05 R38.2
UART1_RX: length 1.6
  TOP w0.1: 16.02,3.77 16.02,2.83 TP5.1
UART1_TX: length 0.8
  TOP w0.1: TP2.1 15.68,3.77
UART_RE_DE: length 41.9
  TOP w0.1: 16.73,3.77 16.73,3.44 16.57,3.29 16.57,2.23 16.35,2 14.3,2 13.7,1.4 5.5,1.4 5,1.9 5,5.4 4.3,6.1 3.35,6.1 2.95,6.5 2.95,23.8 2.45,24.3 2.45,24.8 v1(2.9,25.25)
  BOTTOM w0.35: U8.3 3.23,25.57 v1(2.9,25.25) 3.23,24.93 U8.2
USB_DM: length 39
  TOP w0.175: J4.3 12.62,33.92 12.14,34.41 12.14,34.64 v1(12.4,34.9) ; U6.70 20.93,13 20.96,13.04 20.96,13.46 21.4,13.89 21.4,14.54 23.74,16.88 23.74,27.03 19.78,30.99 12.46,30.99 11.86,31.58 11.86,31.94 v1(11.6,32.2)
  BOTTOM w0.175: v1(11.6,32.2) 11.76,32.36 11.76,32.85 11.61,33 10.44,33 10.11,33.33 10.11,35.26 10.61,35.76 11.83,35.76 12.24,35.36 12.24,35.06 v1(12.4,34.9)
USB_DP: length 38.5
  TOP w0.175: U6.69 21.27,13 21.24,13.04 21.24,13.34 21.68,13.78 21.68,14.43 24.01,16.76 24.01,27.15 19.9,31.26 12.57,31.26 12.14,31.7 12.14,31.94 v1(12.4,32.2) ; J4.2 11.38,33.92 11.86,34.41 11.86,34.64 v1(11.6,34.9)
  BOTTOM w0.175: v1(12.4,32.2) 12.21,32.2 arc(12.09,32.25) 12.04,32.38 12.04,32.96 11.72,33.27 10.56,33.27 10.39,33.44 10.39,35.15 10.73,35.49 11.72,35.49 11.96,35.24 11.96,35.08 arc(11.91,34.95) 11.79,34.9 v1(11.6,34.9)
N19124200: length 2.1
  TOP w0.5: v1(28.52,24.2) U9.2
  BOTTOM w0.5: C67.1 v1(28.52,24.2)
N19124268: length 2.2
  TOP w0.5: U9.15 28.52,30.48 28.85,30.15 v1(28.85,29.8)
  BOTTOM w0.5: v1(28.85,29.8) R56.2
N19124324: length 1.8
  TOP w0.5: U9.7 34.88,21.32 C69.1
N19124380: length 2.6
  TOP w0.5: U9.10 v1(34.88,29.8)
  BOTTOM w0.5: v1(34.88,29.8) R57.2
N19178192: length 1.8
  BOTTOM w0.5: C1.1 22.55,31.85 22.5,31.85
  BOTTOM w0.6: U1.1 22,32.95 22.5,32.45 22.5,31.85
